# EAGLE board TinyCube14_FourLayerABC_HorizHeader (EAGLE 7.5.0)

Size 25.4 x 25.91 mm. Coordinates in mm from the lower left corner, seen from the top.
Outline: 25.4,1.27 25.4,1.27
Outline: 20.83,25.91 20.83,0 0,0 0,25.91 20.83,25.91
Copper layers (1*16): Top 0.0356mm / dielectric 1.5011mm / Bottom 0.0356mm
Design rules "oshpark-2layer": minimum track width 6mil, minimum drill 13mil, track to track 6mil, track to pad 6mil, pad to pad 6mil, via to via 6mil, smd to smd 6mil, copper to edge 15mil, drill to drill 6mil, minimum pad ring 7mil, minimum via ring 7mil, stop-mask expansion 2.5mil, vias tented up to drill 0mil, thermal gap 10mil

## Footprints (pad centres in the part's own frame; a part is rotated, then mirrored left to right if it is on the bottom)
10MIL = drill 0.33 pad 1.143: + 1.27,1.27; B 1.27,-1.27; G -1.27,-1.27; R -1.27,1.27
TINY_HEADER_PKG = drill 0.6 pad 1.422: P$1 0,0; P$2 0,-2.54; P$3 0,-5.08; P$4 0,-7.62; P$5 0,-10.16; P$6 0,-12.7; P$7 0,-15.24; P$8 0,-17.78

## Placement (x,y rotation side)
U$35  PILLAR  [10MIL]  2.79,20.57 0 top
U$36  PILLAR  [10MIL]  7.87,20.57 0 top
U$37  PILLAR  [10MIL]  12.95,20.57 0 top
U$38  PILLAR  [10MIL]  18.03,20.57 0 top
U$39  PILLAR  [10MIL]  2.79,15.49 0 top
U$40  PILLAR  [10MIL]  7.87,15.49 0 top
U$41  PILLAR  [10MIL]  12.95,15.49 0 top
U$42  PILLAR  [10MIL]  18.03,15.49 0 top
U$43  PILLAR  [10MIL]  2.79,10.41 0 top
U$44  PILLAR  [10MIL]  7.87,10.41 0 top
U$45  PILLAR  [10MIL]  12.95,10.41 0 top
U$46  PILLAR  [10MIL]  18.03,10.41 0 top
U$47  PILLAR  [10MIL]  2.79,5.33 0 top
U$48  PILLAR  [10MIL]  7.87,5.33 0 top
U$49  PILLAR  [10MIL]  12.95,5.33 0 top
U$50  PILLAR  [10MIL]  18.03,5.33 0 top
U$51  TINY_HEADER_DEV  [TINY_HEADER_PKG]  1.52,1.52 90 top
U$52  TINY_HEADER_DEV  [TINY_HEADER_PKG]  1.52,24.38 90 top

## Library data of the parts
U$35-U$50 = PILLAR
U$51 U$52 = TinyHeader

## Nets
N$1: U$35.R U$41.R U$46.R U$48.R U$51.P$1
N$7: U$35.+ U$40.+ U$45.+ U$50.+ U$52.P$6
N$8: U$36.R U$42.R U$45.R U$47.R U$52.P$4
N$9: U$35.G U$36.G U$37.G U$38.G U$51.P$2
N$10: U$39.G U$40.G U$41.G U$42.G U$51.P$4
N$11: U$43.G U$44.G U$45.G U$46.G U$51.P$6
N$12: U$47.G U$48.G U$49.G U$50.G U$51.P$8
N$13: U$35.B U$39.B U$43.B U$47.B U$52.P$1
N$14: U$38.R U$40.R U$43.R U$49.R U$51.P$5
N$15: U$37.B U$41.B U$45.B U$49.B U$52.P$8
N$16: U$38.B U$42.B U$46.B U$50.B U$52.P$7
N$17: U$36.B U$40.B U$44.B U$48.B U$52.P$2
N$18: U$36.+ U$39.+ U$46.+ U$49.+ U$51.P$3
N$19: U$37.+ U$42.+ U$43.+ U$48.+ U$52.P$3
N$21: U$38.+ U$41.+ U$44.+ U$47.+ U$51.P$7
N$22: U$37.R U$39.R U$44.R U$50.R U$52.P$5

## Tracks (layer width: path | path; a pad name or v marks a point on that pad's centre or on a via)
N$1  (4 unrouted)
N$7  (4 unrouted)
N$8  (4 unrouted)
N$9  (4 unrouted)
N$10  (4 unrouted)
N$11  (4 unrouted)
N$12  (4 unrouted)
N$13  (4 unrouted)
N$14  (4 unrouted)
N$15  (4 unrouted)
N$16  (4 unrouted)
N$17  (4 unrouted)
N$18  (4 unrouted)
N$19  (4 unrouted)
N$21  (4 unrouted)
N$22  (4 unrouted)

## Text on the board
tPlace: A | B | C
bPlace: A | B | C
tNames: D9 | D8 | D12 | A3 | A1 | D10 | D6 | D7 | A0 | D2 | D11 | D3 | A2 | D4 | D13 | D5